# Altium PCB coverter pcb.PcbDoc
Units mm, origin at the board's own origin, x right, y up, seen from the top; angles counter-clockwise.
Board outline 72 x 37 mm, 4 copper layers (Top Layer, Inner_GND, Inner_PWR, Bottom Layer), stack 1.471 mm thick; 21 components, 14 nets, 67 pads, 10 vias.
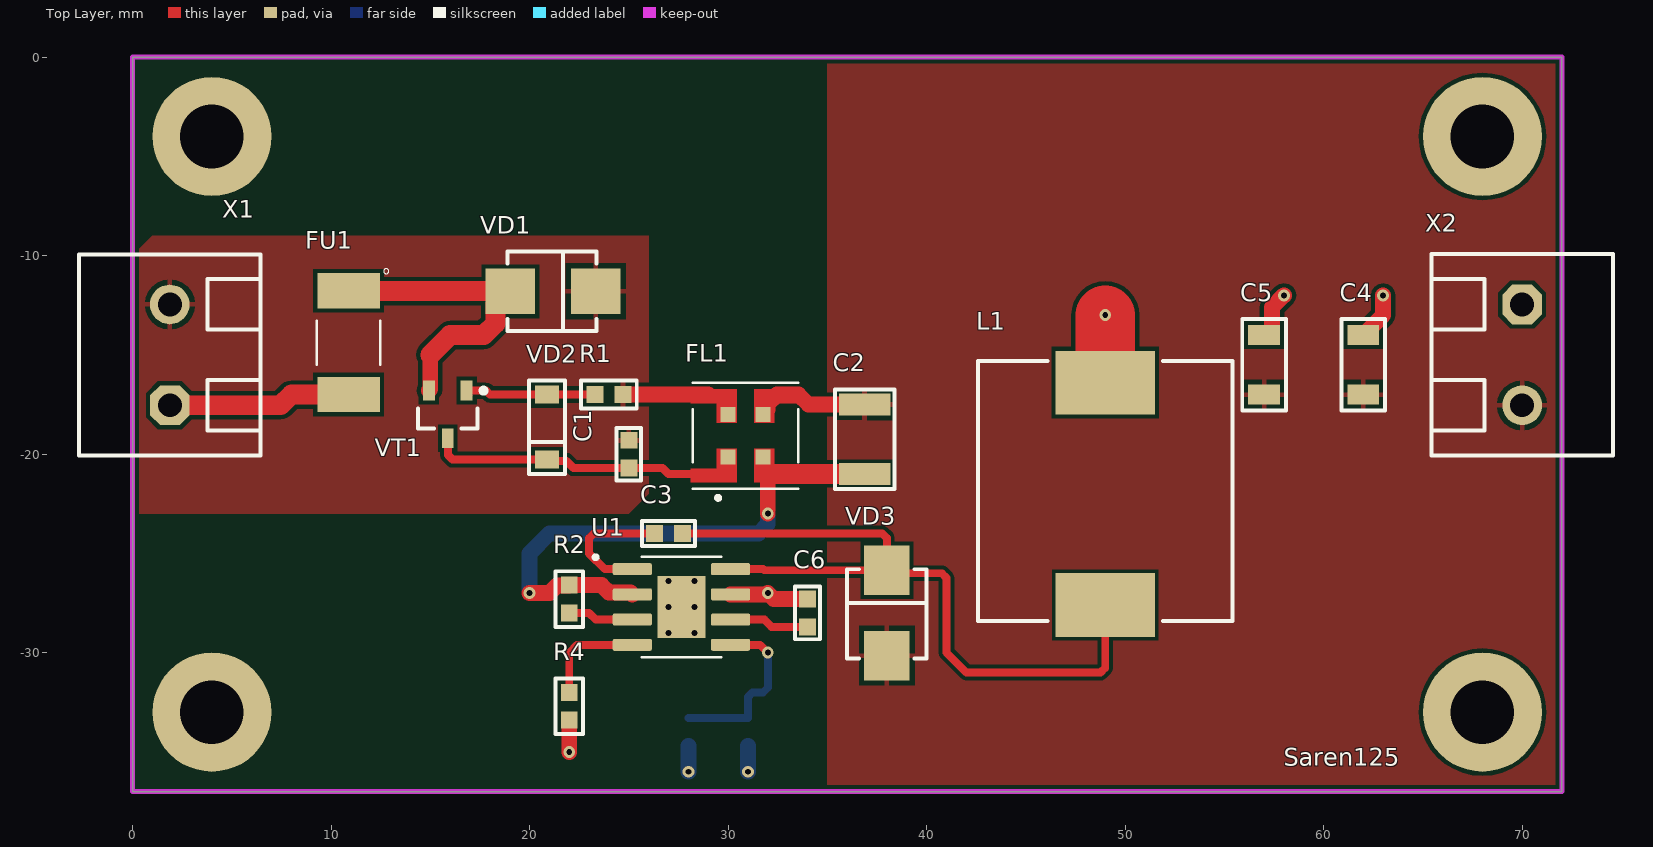
[diagram p0: Top Layer view]
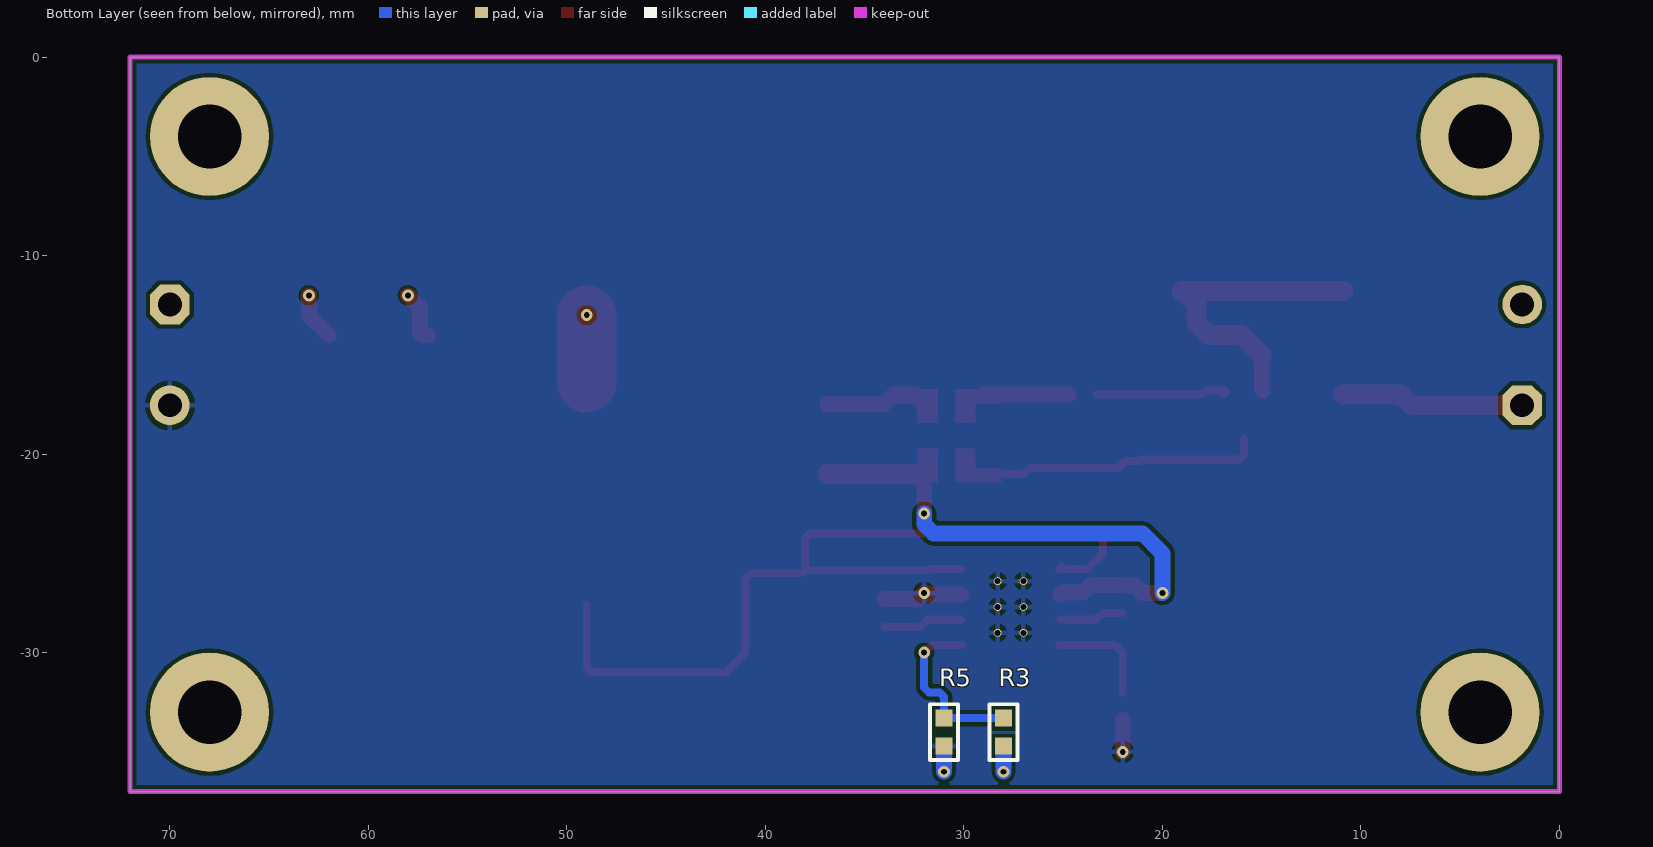
[diagram p1: Bottom Layer view, seen from below]
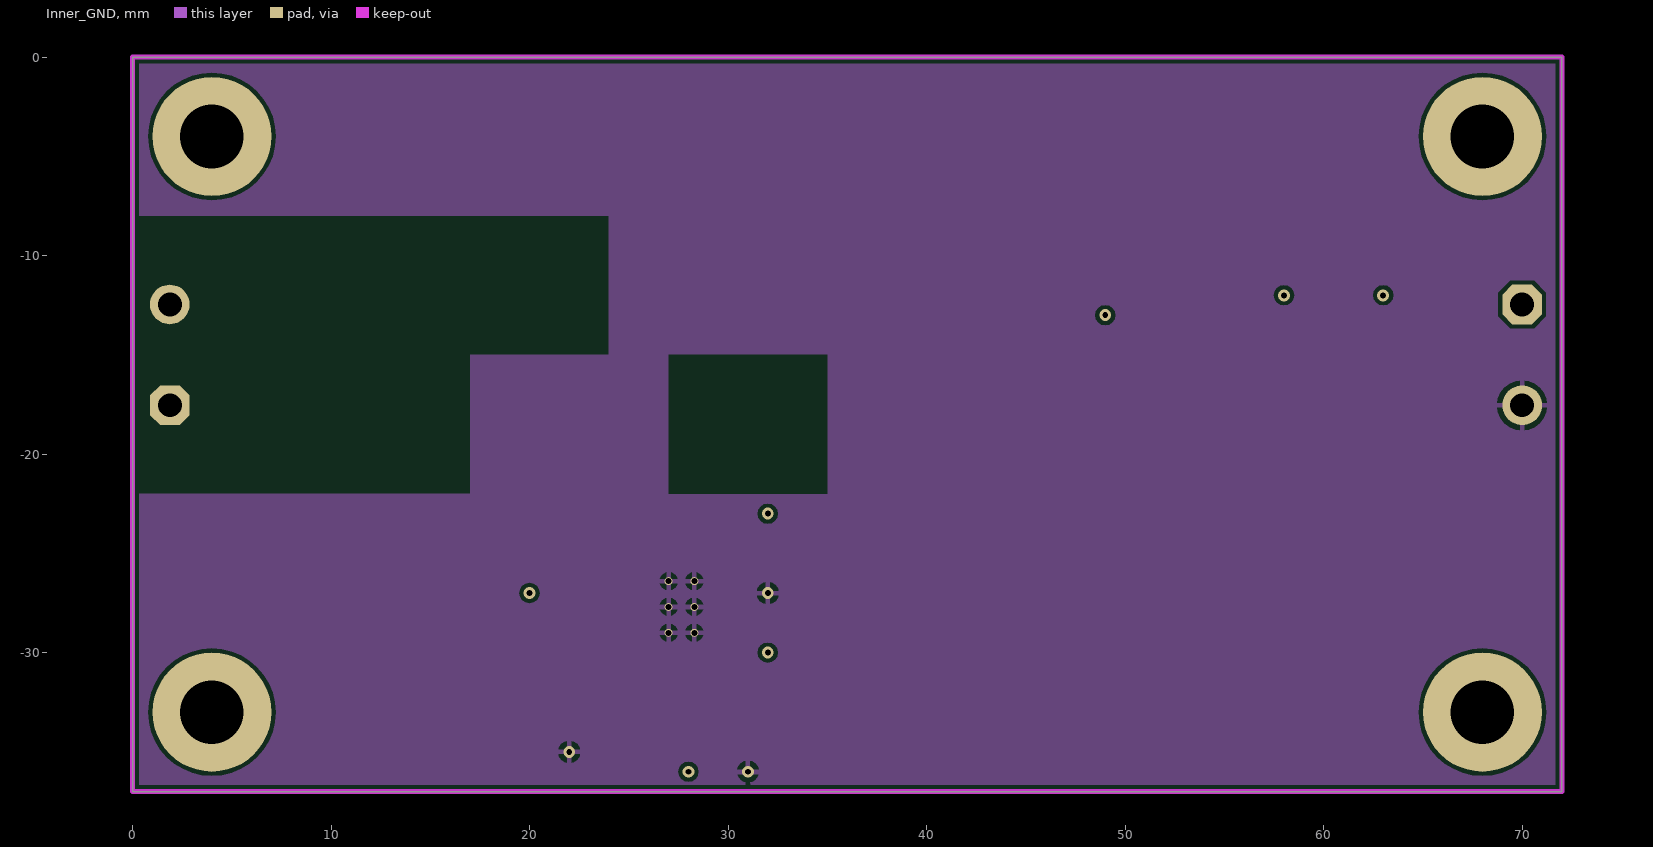
[diagram p2: Inner_GND]
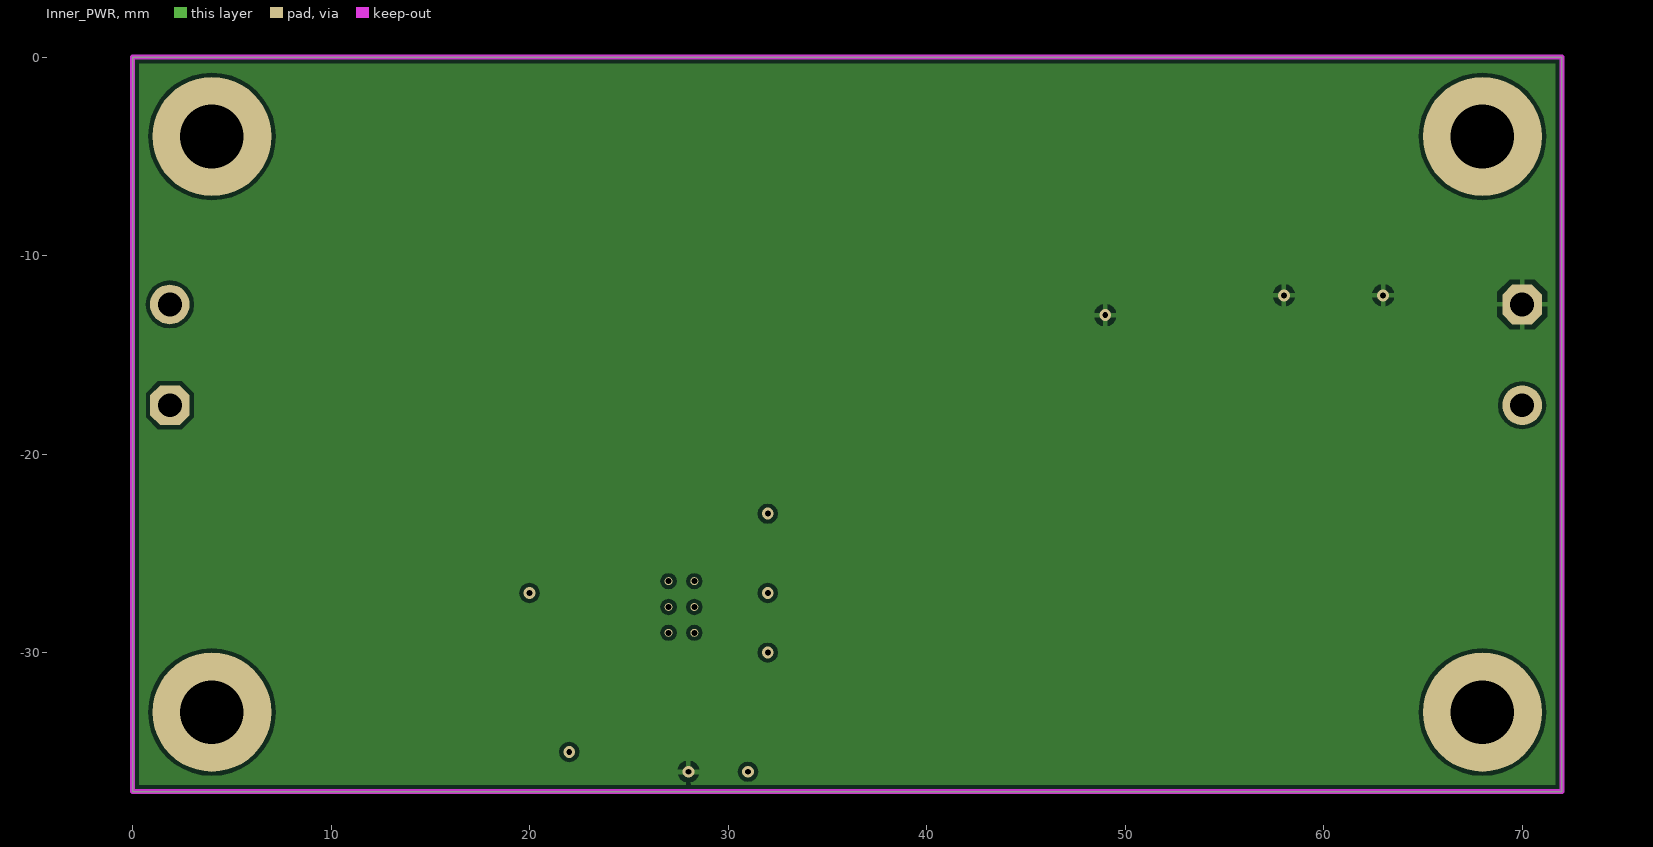
[diagram p3: Inner_PWR]
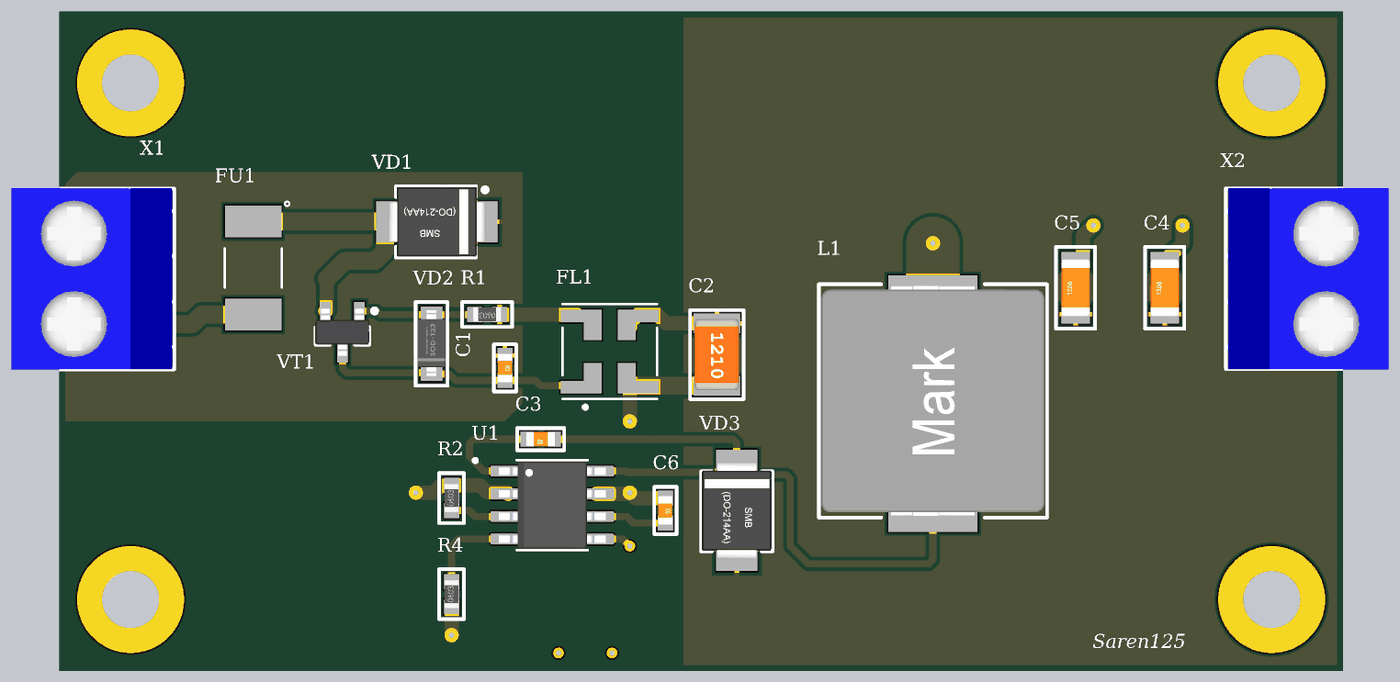
[diagram p4: 3D render of the assembled board from above, using the file's embedded part models]

## Layer stack, top to bottom
Top Solder: solder mask 0.0102, Solder Resist, Dk 3.5
Top Layer: signal copper 0.0356
Dielectric 2: prepreg 0.1651, PP-019, Dk 4.5
Inner_GND: signal copper 0.035
Dielectric 1: dielectric 1, FR-4, Dk 4.8
Inner_PWR: signal copper 0.035
Dielectric 3: prepreg 0.1651, PP-019, Dk 4.5
Bottom Layer: signal copper 0.0356
Bottom Solder: solder mask 0.0102, Solder Resist, Dk 3.5

## Board outline
0,-37 0,0 72,0 72,-37

## Design rules (kind name [scope] priority, off if disabled: settings)
Clearance Clearance_1 [All] p1: gap=0.2 ignorepadtopadclearanceinfootprint=FALSE
Clearance Clearance_power [InNetClass('Power')] p2: gap=0.3 ignorepadtopadclearanceinfootprint=FALSE
PolygonConnect [All] p1: connectstyle=Relief reliefconductorwidth=0.254 reliefentries=4 polygonreliefangle="90 Angle" airgapwidth=0.254
RoutingVias [All] p1: holewidth=0.3 width=0.6 viastyle="Through Hole" minholewidth=0.3 minwidth=0.6 maxholewidth=0.3 maxwidth=0.6
SolderMaskExpansion [All] p1: expansion=0.102 istentingtop=FALSE
Width Width_1 [InNetClass('net')] p1: maxlimit=0.4 minlimit=0.2 preferedwidth=0.25
Width [InNetClass('Power')] p2: maxlimit=3 minlimit=0.8 preferedwidth=1
30 further rules are at their usual default settings.

## Classes and differential pairs
net class net: NetC1_2 NetC3_1 NetC3_2 NetC6_2 NetR1_2 NetR2_1 NetR3_1 NetR4_2
net class POWER: +5V_PWR +24V_EMI +24V_IN +24V_IN_FUSED GND_IN GND_SYSTEM

## Components (designator, comment, footprint, x,y, rotation, side; value= is the part's Value field where it differs from the comment)
C1 "Ceramic capacitor, 0.1μF 50V, X7R, ±10%, , 0603, -55...+125°C" "CAP: 0603" 25,-20 r270 top value="0.1μF 50V"
C2 "Ceramic capacitor, 10uF, X7R, ±10%, 50V, 1210, -55...+125°C" "CAP: 1210" 36.88,-19.25 r270 top value=10uF
C3 "Ceramic capacitor, 0.1μF 50V, X7R, ±10%, , 0603, -55...+125°C" "CAP: 0603" 27,-24 r180 top value="0.1μF 50V"
C4 "22uF 16V" CH1206C 62,-15.5 r90 top
C5 "22uF 16V" CH1206C 57,-15.5 r90 top
C6 "Ceramic capacitor, 10nF 50V, X7R, ±10%, , 0603, -55...+125°C" "CAP: 0603" 34,-28 r270 top value="10nF 50V"
FL1 "DLW5BTM102SQ2L" FIL_DLW5BTM102SQ2L 30.875,-19.075 r180 top
FU1 "1812L110PRT" FUSM4632X200N 10.88,-14.385 r270 top
L1 "='='Fixed inductor'+', '+Value+', '+''+', '+'SRP1265A'+', '+'13.5A'+', '+'-40...+150°C''" "IND: SRP1265A" 49,-22 r270 top
R1 "10кОм" CH0603R 24,-17 r180 top
R2 "100кОм" CH0603R 22,-27.3 r90 top value=10кОм
R3 "100кОм" CH0603R 28,-34 r270 bottom value=10кОм
R4 "91кОм" CH0603R 22,-32.7 r90 top value=10кОм
R5 "17.8кОм" CH0603R 31,-34 r90 bottom value=10кОм
U1 "LMR14030SDDAR" SOIC127P600X170-9N 27.65,-27.7 r0 top
VD1 "SMBJ33A" SMB 21.18,-11.8 r0 top
VD2 "BZT52C12S" SOD123 20.88,-17 r270 top
VD3 "Schottky diode, 80V, 500mA, 1V, 15pF, SOD-123, -55...+150°C" "DIODE: SMB" 38,-28 r90 top
VT1 "AO3407A" SOT23_132 15.88,-18 r270 top
X1 "300-02P-5.08" "CON: 300-02P-5.08" 1.88,-15 r90 top
X2 "300-02P-5.08" "CON: 300-02P-5.08" 70,-15 r270 top

## Footprints (in the part's own frame and the unit in brackets; to place one, negate y for a bottom-side part, rotate by r counter-clockwise, add the part's x,y. Pads: shape width x height; smd on the part's side, far side on the other; paste and mask are expansions set on the pad)
"CAP: 0603" [mm]
  rect 0.85x0.85 smd: 1(-0.7,0) 2(0.7,0)
  silkscreen extent -1.33,-0.63 1.33,0.63, body extent -0.8,-0.4 0.8,0.4, height 0.3
"CAP: 1210" [mm]
  rect 1.1x2.6 smd: 1(-1.75,0) 2(1.75,0)
  silkscreen extent -2.5,-1.5 2.5,1.5, body extent -2,-1.24 2,1.24, height 1.7
CH0603R [mm]
  rect 0.85x0.85 smd: 1(-0.7,0) 2(0.7,0)
  silkscreen extent -1.4,-0.7 1.4,0.7, body extent -0.8,-0.4 0.8,0.4, height 0.44
CH1206C [mm] "Non polar chip capacitor, size 1206"
  rect 1x1.6 smd: 1(-1.5,0) 2(1.5,0)
  silkscreen extent -2.3,-1.1 2.3,1.1, body extent -1.6,-0.8 1.6,0.8, height 1
"CON: 300-02P-5.08" [mm] "2 pin 5.08mm screw connector"
  oct 2x2 hole 1.2: 1(-2.54,0)
  round 2 hole 1.2: 2(2.54,0)
  round 0.5 on Mech1: 14(-4.5,-3.9)
  silkscreen extent -5.08,-4.57 5.06,4.57, body extent -5.08,-4.44 5.08,4.56, height 12.5
"DIODE: SMB" [mm]
  rect 2.5x2.3 smd: 1(-2.15,0) 2(2.15,0)
  silkscreen extent -2.3,-2 2.2,2, body extent -2.75,-1.95 2.75,1.95, height 2.45
FIL_DLW5BTM102SQ2L [mm]
  rect 0.75x0.75 smd: 1(0.875,1.075) 2(-0.875,1.075) 3(-0.875,-1.075) 4(0.875,-1.075)
  Top Layer region: -0.45,0.65 -1.45,0.65 -1.45,1.65 -2.75,1.65 -2.75,2.35 -0.45,2.35
  Top Layer region: 1.45,-1.65 2.75,-1.65 2.75,-2.35 0.45,-2.35 0.45,-0.65 1.45,-0.65
  Top Layer region: 2.75,1.65 1.45,1.65 1.45,0.65 0.45,0.65 0.45,2.35 2.75,2.35
  Top Layer region: -0.45,-2.35 -2.75,-2.35 -2.75,-1.65 -1.45,-1.65 -1.45,-0.65 -0.45,-0.65
  silkscreen extent -2.65,-2.66 2.65,3.22
FUSM4632X200N [mm]
  rect 1.78x3.15 smd: 1(-2.615,0) 2(2.615,0)
  silkscreen extent -3.73,-1.6 1.1,2.03
"IND: SRP1265A" [mm]
  rect 3.2x5 smd: 1(-5.6,0) 2(5.6,0)
  silkscreen extent -6.7,-6.4 6.4,6.4, body extent -6.6,-6.25 6.3,6.25, height 6.31
SMB [mm]
  rect 2.5x2.3 smd: 1(-2.15,0) 2(2.15,0)
  round 0.5 on Top Overlay: ""(2.7,1.8)
  silkscreen extent -2.3,-2 2.2,2, body extent -2.75,-1.95 2.75,1.95, height 2.45
SOD123 [mm]
  rect 0.91x1.22 smd: 1(0,0) 2(3.275,0)
  round 0.5 on Mech1: 4(3,0.4)
  silkscreen extent -0.7,-0.9 4,0.9, body extent -0.25,-0.8 3.45,0.8, height 1.25
SOIC127P600X170-9N [mm]
  rrect25% 1.97x0.6 smd paste+0 mask+0.102: 1(-2.475,1.905) 2(-2.475,0.635) 3(-2.475,-0.635) 4(-2.475,-1.905) 5(2.475,-1.905) 6(2.475,-0.635) 7(2.475,0.635) 8(2.475,1.905)
  rect 2.4x3.1 smd paste-3 mask+0: 9(0,0)
  round 0.4 hole 0.3 mask+0.102: V1(-0.65,1.3) V2(0.65,1.3) V3(-0.65,0) V4(0.65,0) V5(-0.65,-1.3) V6(0.65,-1.3)
  silkscreen extent -4.42,-2.52 2,2.6, body extent -3,-2.45 3,2.45, height 1.7
SOT23_132 [mm] "SOT23, 3-Leads, Body 3,0x2,6mm (max), Pitch 0,95mm, IPC Medium Density"
  rect 1x0.6 smd: 1(-1.2,0.95) 2(-1.2,-0.95) 3(1.2,0)
  round 0.5 on Mech1: ""(-0.9,1.1)
  silkscreen extent -1.32,-1.5 0.7,1.92, body extent -1.32,-1.52 1.32,1.52, height 1.12

## Part data
C1 C3 C6: library part Ceramic_0603, Manufacturer=Yageo, Package=0603, PartNumber=CC0603KRX7R7BB104, Temperature=-55...+125°C, Tolerance=±10%, TypeCapacitor="Ceramic capacitor", TypeDielectric=X7R, HelpURL=https://www.digikey.com/product-detail/en/yageo/CC0603KRX7R7BB104/311-1088-1-ND/302998
  C1 C3: ValueManufacturerPartNumber="Ceramic capacitor, 0.1μF 50V, X7R, ±10%, , 0603, -55...+125°C"
  C6: ValueManufacturerPartNumber="Ceramic capacitor, 10nF 50V, X7R, ±10%, , 0603, -55...+125°C"
C2: library part Ceramic_1210, Manufacturer=Yageo, Package=1210, PartNumber=CC1210KKX7R9BB104, Temperature=-55...+125°C, Tolerance=±10%, TypeCapacitor="Ceramic capacitor", TypeDielectric=X7R, Voltage=50V, HelpURL=https://www.digikey.com/product-detail/en/yageo/CC1210KKX7R9BB104/311-4522-1-ND/8025611, ValueManufacturerPartNumber="Ceramic capacitor, 10uF, X7R, ±10%, 50V, 1210, -55...+125°C"
C4 C5: library part Capacitor
FL1: "2 Line Common Mode Choke Surface Mount 1 kOhms @ 100MHz 2A DCR 34mOhm", Package="Horizontal-6 Murata", Availability=Unavailable, MF=Murata, MP=DLW5BTM102SQ2L, Price=None, SnapEDA_Link=https://www.snapeda.com/parts/DLW5BTM102SQ2L/Murata/view-part/4300900/?ref=snap
FU1: "PTC Resettable Fuse 1.1A(hold) 1.95A(trip) 33VDC 20A 0.8W 0.5s 0.06Ohm SMD Solder Pad 1812 T/R", Package=None, Availability=Unavailable, MP=1812L110PRT, Price=None
L1: library part Inductor_SRP1265A, Manufacturer=Bourns, MaxCurrent=13.5A, Package=SRP1265A, PartNumber=SRP1265A-4R7M, Temperature=-40...+150°C, TypeInductor="Fixed inductor", ValueManufacturerPartNumber="='Fixed inductor'+', '+Value+', '+''+', '+'SRP1265A'+', '+'13.5A'+', '+'-40...+150°C'", HelpURL=https://www.digikey.com/product-detail/en/bourns-inc/SRP1265A-4R7M/SRP1265A-4R7MCT-ND/4876721, SRP1265A-150M=15μH
R1 R2 R3 R4 R5: library part Resistor
U1: "SIMPLE SWITCHERÂ® 40-V, 3.5-A, 2.2-MHz step-down converter with 40-uA IQ", Package="HSOIC-8 Texas Instruments", Check_prices=https://www.snapeda.com/parts/LMR14030SDDAR/Texas+Instruments/view-part/?ref=eda, MF="Texas Instruments", MP=LMR14030SDDAR, SnapEDA_Link=https://www.snapeda.com/parts/LMR14030SDDAR/Texas+Instruments/view-part/?ref=snap
VD1: library part TVS-diod
VD2: library part "Diod Zener"
VD3: library part Schottky_single, Current=500mA, Manufacturer="Diodes Incorporated", Package=SOD-123, PartNumber=SK56B, Temperature=-55...+150°C, Voltage=80V, VoltageDrop=1V, HelpURL=https://www.digikey.com/product-detail/en/diodes-incorporated/MBR0580S1-7/MBR0580S1-7DICT-ND/5080371, RecoveryTime=15pF, TypeDiode="Schottky diode", ValueManufacturerPartNumber="Schottky diode, 80V, 500mA, 1V, 15pF, SOD-123, -55...+150°C"
VT1: library part P-chanel, "Mosfet"
X1 X2: library part 2-Connector

## Free pads (board coordinates)
  round 6 hole 3.2: ""(4,-33) ""(4,-4) ""(68,-33) ""(68,-4)

## Via types
v1: diameter 0.6, hole 0.3, Top Layer to Bottom Layer, 10 vias

## Nets (pads, with @x,y where several pads share a name; then routed paths per layer and width w, separated by ;. In a path a pad name is that pad's centre, name@x,y a point inside that pad or via, vN(x,y) a via of type N, cw(c..) or ccw(c..) an arc to the next point about the centre after c; other vN are vias at no path point)
+5V_PWR: C4.2 C5.2 L1.1 R3.2 X2.1 | length 9.7
  Top Layer w0.8: C5.2 57.3,-14 57.4,-13.9 57.4,-12.6 v1(58,-12) ; C4.2 63,-13 v1(63,-12)
  Top Layer w3: L1.1 v1(49,-13)
  Bottom Layer w0.8: v1(28,-36) R3.2
+24V_EMI: C2.2 FL1.2 R2.2 U1.2 | length 27.6
  Top Layer w0.8: v1(20,-27) 21,-27 21.375,-26.625 21.975,-26.625 R2.2 23.625,-26.6 23.99,-26.965 25.075,-26.965 U1.2 ; v1(32,-23) 32,-21
  Top Layer w1: 32,-21 C2.2
  Bottom Layer w0.8: v1(20,-27) 20,-25 21,-24 31.531,-24 32,-23.531 v1(32,-23)
+24V_IN: FU1.2 X1.1 | length 9.2
  Top Layer w1: X1.1 7.46,-17.54 8,-17 FU1.2
+24V_IN_FUSED: FU1.1 VD1.1 VT1.2 | length 15.9
  Top Layer w0.8: VT1.2 15,-16.73 15,-15
  Top Layer w1: FU1.1 10.895,-11.785 VD1.1@19.015,-11.785 ; 15,-15 16,-14 17.694,-14 18.28,-13.414 18.28,-12.45 18.93,-11.8 VD1.1
GND_IN: C1.1 FL1.4 R1.1 VD1.2 X1.2 | length 4.3
  Top Layer w0.8: R1.1 29,-17
GND_SYSTEM: C2.1 C4.1 C5.1 C6.1 FL1.3 R4.1 R5.1 U1.7 U1.9 U1.V1 U1.V2 U1.V3 U1.V4 U1.V5 U1.V6 VD3.1 X2.2 | length 12.8
  Top Layer w0.8: v1(22,-35) R4.1 ; U1.7 31.935,-27.065 v1(32,-27) 32.3,-27.3 C6.1 ; FL1.3 32,-17.75 32,-17.469 32.469,-17 33.55,-17 34.05,-17.5 C2.1
  Bottom Layer w0.8: v1(31,-36) R5.1
NetC1_2: C1.2 FL1.1 VD2.2 VT1.3 | length 16.1
  Top Layer w0.4: VT1.3 15.888,-19.208 15.888,-20.041 16.122,-20.275 21.035,-20.275 21.103,-20.343 21.856,-20.343 22.213,-20.7 C1.2 26.7,-20.7 27,-21 29.766,-21 29.825,-20.941 29.825,-20.325 FL1.1
NetC3_1: C3.1 L1.2 U1.8 VD3.2 | length 38.5
  Top Layer w0.4: C3.1 37.766,-24 38,-24.234 VD3.2 ; U1.8 31.766,-25.795 31.821,-25.85 VD3.2 ; L1.2 49,-30.766 48.766,-31 42,-31 41,-30 41,-26.234 40.766,-26 38.15,-26 VD3.2
NetC3_2: C3.2 U1.1 | length 6.8
  Top Layer w0.4: U1.1@25.075,-25.695 U1.1 23.795,-25.795 23,-25 23,-24.234 23.234,-24 C3.2
NetC6_2: C6.2 U1.6 | length 4
  Top Layer w0.4: U1.6 31.824,-28.335 32.189,-28.7 C6.2
NetR1_2: R1.2 VD2.1 VT1.1 | length 6.8
  Top Layer w0.4: VT1.1@16.93,-17 16.83,-16.9 VT1.1 17.8,-16.8 18,-17 VD2.1 R1.2
NetR2_1: R2.1 U1.3 | length 3.3
  Top Layer w0.4: R2.1 23,-28 23.335,-28.335 U1.3
NetR3_1: R3.1 R5.2 U1.5 | length 9.1
  Top Layer w0.4: U1.5 31.605,-29.605 v1(32,-30)
  Bottom Layer w0.4: R3.1 R5.2 31,-32.234 31.234,-32 31.766,-32 32,-31.766 v1(32,-30)
NetR4_2: R4.2 U1.4 | length 5.3
  Top Layer w0.4: R4.2 22,-30 22.395,-29.605 U1.4
pads on no net: VD1. VD2.4 VT1. X1.14 X2.14

## Polygon pours and split planes (outlines as drawn)
GND_SYSTEM on Top Layer "GND_SYSTEM_L01_P010" (solid, pour order 10): 35,0 35,-37 72,-37 72,0
GND_IN on Top Layer "GND_IN_L01_P009" (solid, pour order 9): 36,0
GND_IN on Top Layer "GND_IN_L01_P007" (solid, pour order 7): 0,-10 1,-9 26,-9 26,-22 25,-23 0,-23
GND_IN on Top Layer "GND_IN_L01_P006" (solid, pour order 6): 0,-10
no net on Top Layer "NONET_L01_P003" (solid, pour order 3): 12,-24
no net on Top Layer "NONET_L01_P000" (solid, pour order 0): 0,-9
GND_SYSTEM on Inner_GND "GND_SYSTEM_L02_P008" (solid, pour order 8): 0,0 72,0 72,-37 0,-37
+5V_PWR on Inner_PWR "+5V_PWR_L03_P011" (solid, pour order 11): 0,0 72,0 72,-37 0,-37
GND_SYSTEM on Bottom Layer "GND_SYSTEM_L04_P013" (solid, pour order 13): 72,0 0,0 0,-37 72,-37

## Keep-outs
Keep-Out Layer:
  the board outline again, w0.254

## Other copper
Top Layer:
  pour cut-out: 35,0
Inner_GND:
  pour cut-out: 27,-15 27,-22 35,-22 35,-15
  pour cut-out: 0,-8 24,-8 24,-15 13,-15 13,-20 0,-20
  pour cut-out: 0,-10 13,-10 13,-22 0,-22
  pour cut-out: 0,-8 17,-8 17,-22 0,-22
  pour cut-out: 8,-7

## Silkscreen, mask and mechanical layers (free items; w line width, h text height)
Top Overlay:
  text "Saren125" at 58,-36 h1.52